# Altium PCB uku20710_proc.PcbDoc (part 2 of 2)
Units mm, origin at the board's own origin, x right, y up, seen from the top; angles counter-clockwise.
Board outline 354.7 x 156.7 mm, 4 copper layers (Top Layer, MidLayer1, MidLayer2, Bottom Layer); 206 components, 528 nets, 730 pads, 458 vias.
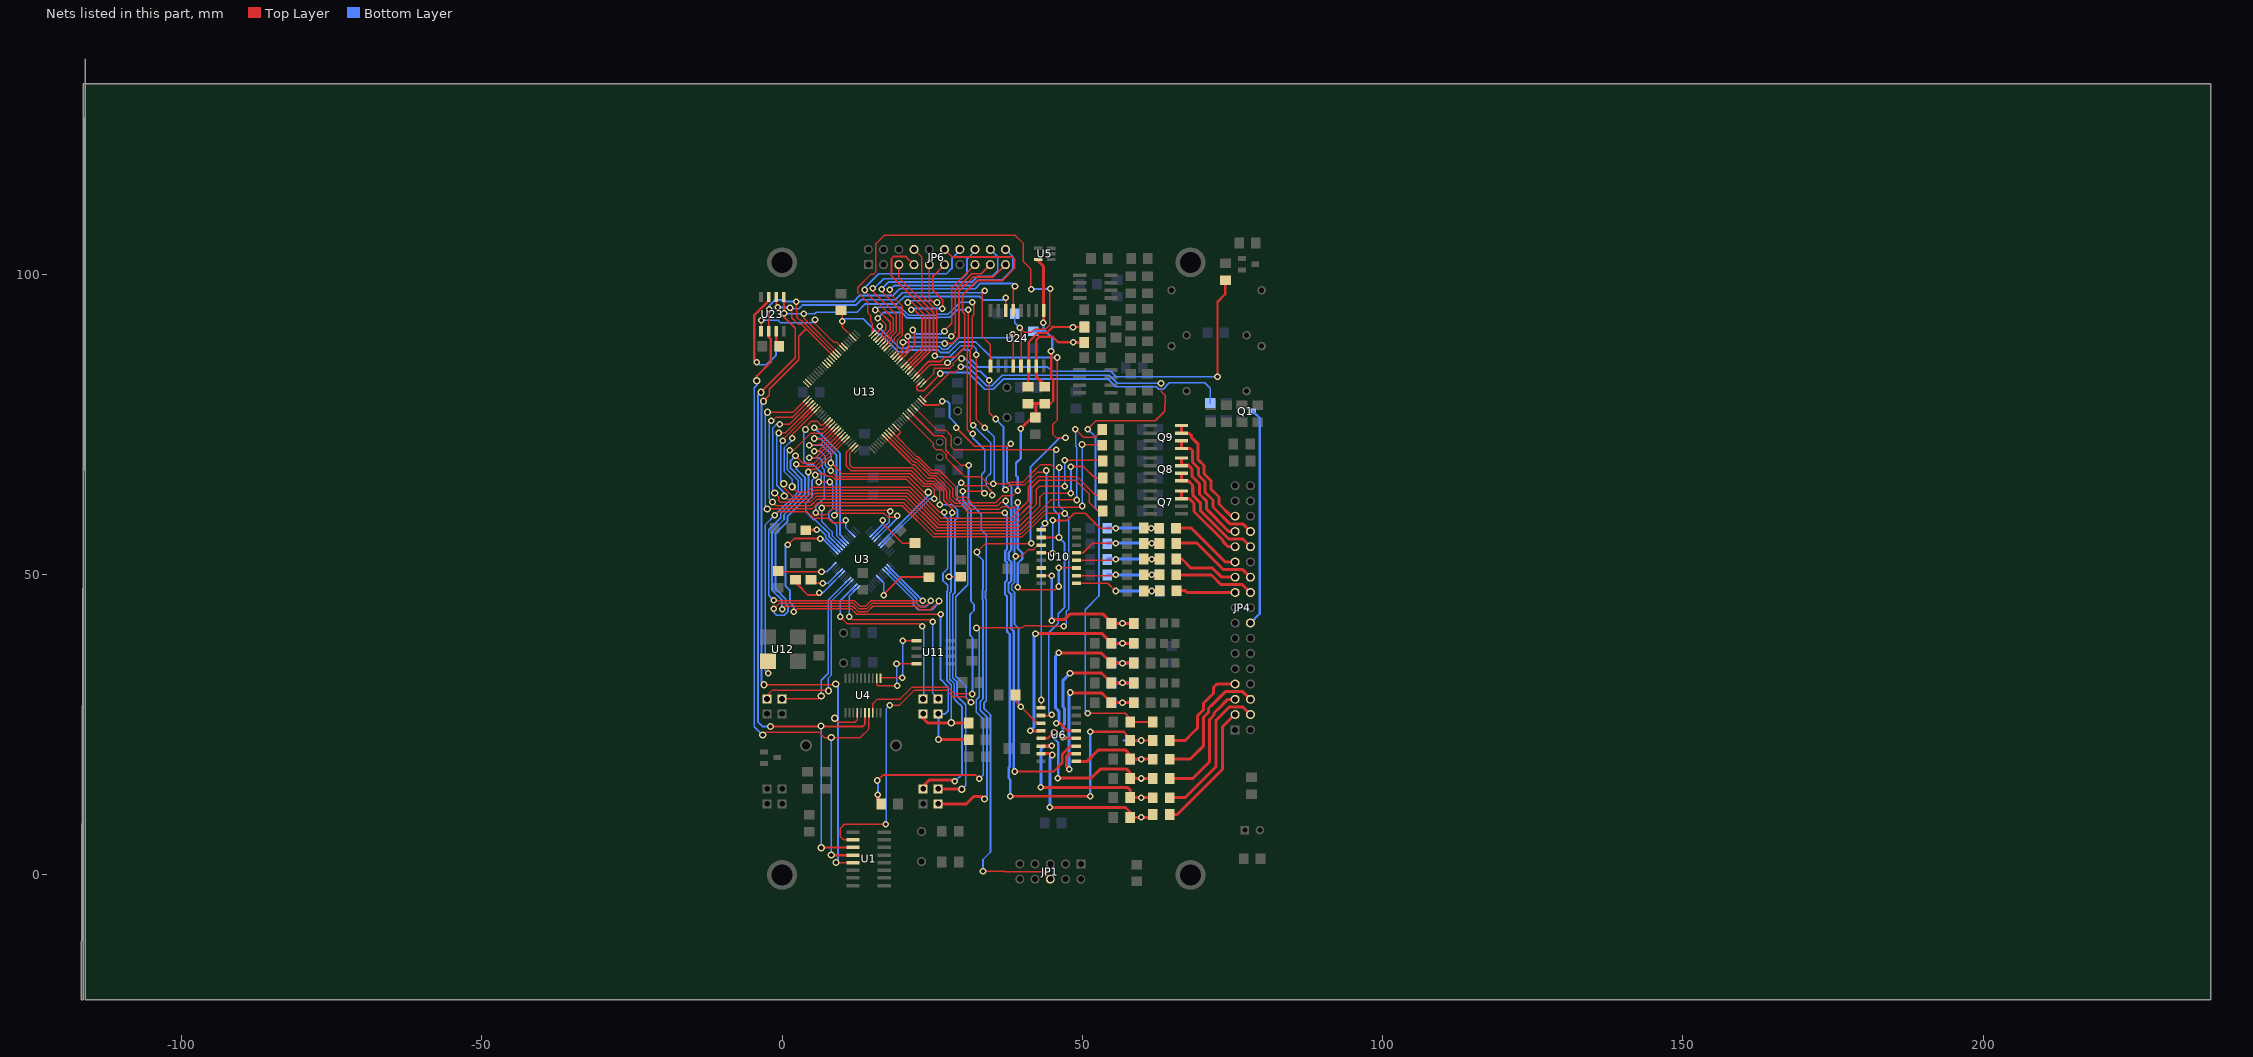
[diagram p2: the nets of this part, all layers, seen from the top]

## Via types
v1: diameter 1.1, hole 0.6, Top Layer to Bottom Layer, 420 vias
v2: diameter 1.2, hole 0.7, Top Layer to Bottom Layer, 29 vias
v3: diameter 1.5, hole 1, Top Layer to Bottom Layer, 8 vias
v4: diameter 1.2, hole 0.6, Top Layer to Bottom Layer, 1 vias

## Nets (pads, with @x,y where several pads share a name; then routed paths per layer and width w, separated by ;. In a path a pad name is that pad's centre, name@x,y a point inside that pad or via, vN(x,y) a via of type N, cw(c..) or ccw(c..) an arc to the next point about the centre after c; other vN are vias at no path point) (continued)
NetQ700_1: 
NetQ700_3: 
NetR3_1: 
NetR3_2: 
NetR3_2: 
NetR3_2: 
NetR3_2: 
NetR3_2: 
NetR3_2: 
NetR3_2: 
NetR4_1: 
NetR4_2: 
NetR5_1: 
NetR5_2: 
NetR6_1: 
NetR6_2: 
NetR7_1: 
NetR7_2: 
NetR7_2: 
NetR8_1: 
NetR8_1: 
NetR8_2: 
NetR8_2: 
NetR20_1: R20.1 U3.7 | length 12.1
  Top Layer w0.3: v1(16.904,46.547) 16.904,46.712 17.853,47.66 18.228,48.035 19.765,49.573 R20.1@24.484,49.573
  Bottom Layer w0.3: U3.7@16.165,49.394 16.913,48.645 16.913,46.706 16.904,46.697 v1(16.904,46.547)
NetR22_2: 
NetR22_2: 
NetR22_2: 
NetR22_2: 
NetR22_2: 
NetR22_2: 
NetR22_2: 
NetR22_2: 
NetR22_2: 
NetR25_1: 
NetR30_2: 
NetR38_1: 
NetR43_1: 
NetR43_2: 
NetR43_2: 
NetR44_2: 
NetR44_2: 
NetR45_2: 
NetR52_1: 
NetR53_1: 
NetR57_1: 
NetR60_1: 
NetR69_2: 
NetR83_1: 
NetR90_2: 
NetR91_1: 
NetR93_1: 
NetR95_1: R95.1 U23.3 | length 2.4
  Top Layer w0.4: R95.1@-1,88.15 -0.965,88.185 U23.3@-0.965,90.5
NetR96_2: R96.2 U23.7 | length 17.7
  Top Layer w0.4: v1(-4.25,85.35) -4.65,85.75 -4.65,93.15 -2.235,95.565 U23.7@-2.235,96.2
  Bottom Layer w0.3: v1(-4.25,85.35) -3.822,84.922 -2.628,84.922 -1,86.55 -1,88.007 R96.2@-1,88.1
NetR112_1: R112.1 U3.26 X8.1 | length 74.1
  Top Layer w0.25: v1(1.951,43.798) 2.416,44.262 11.577,44.262 12.439,43.4 v1(26.4,43.4)
  Top Layer w0.3: v1(0.951,54.95) 1.986,55.985 v1(6.328,55.985)
  Top Layer w0.5: v2@25.987,22.5 R112.1@31.07,22.5 ; v2@26.031,22.5 v2(26.031,22.507)
  Bottom Layer w0.3: v1@0.551,54.95 0.551,48.099 1.301,47.348 1.301,45.398 1.951,44.748 v1(1.951,43.798) ; v1(6.328,55.985) 6.744,55.985 U3.26@8.846,53.884 ; X8.1@25.981,26.858 26.031,26.858 v2(26.031,22.507) ; X8.1@25.997,26.8 27.173,26.8 27.681,27.308 27.681,31.259 26.4,32.54 v1(26.4,43.4) v1@26.5,43.3
NetR113_1: R113.1 U3.28 X7.1 | length 84
  Top Layer w0.25: v1@5.675,66.368 6.076,66.768 7.026,66.768 7.426,66.368 8.326,66.368 8.844,65.85 20.75,65.85 26.25,60.35 v1(27,60.35)
  Top Layer w0.5: X7.1@23.497,26.8 23.497,26.04 24.23,25.307 R113.1@31.032,25.307
  Bottom Layer w0.3: v1@5.675,66.368 4.975,65.668 4.975,62.917 3.925,61.867 3.925,60.516 5.306,59.135 5.478,59.135 7.828,56.785 7.828,56.316 8.135,56.009 U3.28@9.553,54.591 ; v1(27,60.35) 27,59.8 27.6,59.2 27.6,51 26.8,50.2 26.8,49 27.6,48.2 27.6,47.284 27.447,47.131 27.447,39.283 27.447,32.393 27.6,32.24 28.181,31.659 v2(28.181,25.307)
  other v1: 5.525,66.568
NetR114_1: R114.1 U3.27 | length 6
  Top Layer w0.5: R114.1@4.828,57.485 4.878,57.435 5.728,57.435 v1(5.778,57.485)
  Bottom Layer w0.3: v1(5.778,57.485) 6.328,57.485 7.278,56.535 7.278,56.159 U3.27@9.2,54.237
NetR115_1: R115.1 U3.21 | length 5.7
  Top Layer w0.3: R115.1@4.834,49.123 5.409,48.549 v1(6.753,48.549)
  Bottom Layer w0.25: v1(6.753,48.549) 7.648,48.549 U3.21@9.553,50.454
NetR116_1: R116.1 U3.20 | length 12.7
  Top Layer w0.25: R116.1@2.234,49.123 2.234,48.779 3.428,47.585
  Top Layer w0.3: R116.1@2.234,49.123 2.234,48.779 2.234,48.666 4.302,46.598 6.203,46.598 6.403,46.598 v1@6.503,46.698
  Bottom Layer w0.25: v1(6.203,46.998) 6.853,46.998 7.841,47.987 7.841,48.035 U3.20@9.907,50.101
NetR117_2: R117.2 U3.24 | length 9.6
  Top Layer w0.25: R117.2@-0.629,50.448 v1(6.565,50.448) v1@6.578,50.435
  Bottom Layer w0.25: v1(6.565,50.448) 7.425,50.448 U3.24@8.492,51.515
NetR120_1: R120.1 U3.39 | length 10.6
  Top Layer w0.25: v1@16.878,59.185 16.878,58.385 20.015,55.248 R120.1@22.121,55.248
  Bottom Layer w0.3: U3.39@15.104,56.712 16.878,58.486 v1@16.878,59.185
  other v1: 16.778,59.066
NetR305_2: 
NetR306_2: 
NetR504_1: 
NetR505_2: 
NetR505_2: 
NetR510_1: 
NetR600_1: 
NetR600_2: 
NetR603_1: 
NetR603_2: 
NetR605_2: 
NetR702_2: 
NetR704_2: 
NetR705_1: 
NetS2_1: 
NetU1_1: 
NetU1_4: 
NetU1_5: 
NetU3_13: U3.13 X4.1 | length 32.7
  Top Layer w0.25: v1(11.177,42.962) 11.677,42.462 24.78,42.462 v1(25.08,42.162)
  Bottom Layer w0.25: v1(11.177,42.962) 11.177,46.421 U3.13@12.382,47.626 ; v1(25.08,42.162) 25.05,42.131 25.05,30.289 X4.1@26.031,29.308
NetU3_14: U3.14 X3.1 | length 32.6
  Top Layer w0.25: v1(9.676,42.962) 10.792,41.846 22.895,41.846 v1(23.33,41.411)
  Bottom Layer w0.25: v1(9.676,42.962) 9.676,45.628 U3.14@12.028,47.979 ; v1(23.33,41.411) 23.6,41.141 23.6,29.379 X3.1@23.48,29.258
NetU3_16: U3.16 X1.1 | length 30.7
  Top Layer w0.25: X1.1@-2.503,29.3 -2.503,29.833 -1.576,30.759 7.626,30.759 v2(7.726,30.659)
  Bottom Layer w0.25: v2(7.726,30.659) 7.726,32.759 8.226,33.259 8.226,45.592 U3.16@11.321,48.686
NetU3_17: U3.17 X2.1 | length 27.9
  Top Layer w0.25: X2.1@-0.003,29.3 6.067,29.3 v2(6.526,29.759)
  Bottom Layer w0.25: v2(6.526,29.759) 6.526,32.409 7.676,33.56 7.676,45.749 U3.17@10.967,49.04 ; U3.17@10.928,49.035 U3.17@10.963,49.035
NetU4_1: U4.1 U11.1 | length 12.1
  Top Layer w0.25: U4.1@16.402,32.709 16.503,32.809 v1(20.029,32.809) ; v1(20.079,38.961) 20.084,38.965 U11.1@22.38,38.965
  Bottom Layer w0.25: v1(20.029,32.809) 20.079,32.859 v1(20.079,38.961)
NetU4_2: U4.2 U11.4 | length 11.6
  Top Layer w0.25: U4.2@15.752,32.709 15.752,31.66 15.954,31.458 v1(19.155,31.458) ; v1@19.055,35.155 U11.4@22.38,35.155
  Bottom Layer w0.25: v1(19.055,35.159) 19.055,31.558 v1(19.155,31.458)
NetU5_1: 
NetU8_3: 
NetU8_7: 
NetU8_8: 
NetU11_5: 
NetU14_3: 
NetU14_4: 
NetU14_5: 
NetU14_6: 
NetU14_12: 
NetU14_13: 
NetU14_14: 
NetU15_3: 
NetU15_3: 
NetU15_3: 
NetU15_3: 
NetU15_4: 
NetU15_5: 
NetU15_5: 
NetU15_5: 
NetU15_5: 
NetU15_5: 
NetU15_5: 
NetU15_7: 
NetU15_7: 
NetU15_9: 
NetU15_10: 
NetU15_15: 
NetU16_3: 
NetU16_4: 
NetU16_6: 
NetU19_4: 
NetU21_1: 
NetU21_2: 
NetU503_4: 
NetU600_3: 
NetU700_4: 
NetX13_1: 
NetX15_1: 
NetX23_1: 
NetX32_1: 
NetX33_1: 
OFF1: 
OFF2: 
P0_0: U1.2 U13.46 | length 152.8
  Top Layer w0.25: U1.2@11.853,5.801 10.253,5.801 9.702,6.352 9.702,7.752 10.353,8.402 v1(17.254,8.402) ; v1@15.5,93.9 15.45,93.95 15.45,94 15.5,93.95 16.05,93.95 18,92 18,90.75 17.25,90 17.25,89.607 U13.46@16.402,88.759 ; v1(17.955,28.257) 19.555,28.257 22.056,30.758 27.357,30.758 28.507,29.607 30.408,29.607 v1@31.358,28.657 ; v1(29.858,65.316) 30.408,64.766 33.959,64.766 35.009,63.716 v1(35.009,63.216) ; v1(31.65,95.35) 31.95,95.05 31.95,93.25 31.65,92.95 31.65,87.75 31.35,87.45 31.35,75.3 v1(31.8,74.85)
  Bottom Layer w0.25: v1(17.254,8.402) 17.304,8.452 17.304,27.607 v1(17.955,28.257) ; v1(29.858,65.316) 29.207,64.666 29.207,62.466 30.908,60.765 30.908,48.312 28.907,46.312 28.907,33.058 30.708,31.258 30.708,29.507 31.358,28.857 v1@31.358,28.657 ; v1@31.65,95.3 v1(31.65,95.35) ; v1(31.8,74.85) 34.75,71.9 34.75,66.85 33.959,66.059 33.959,64.816 35.009,63.766 v1(35.009,63.216)
  Bottom Layer w0.3: v1(15.5,94.05) 15.95,94.5 19.65,94.5 20.02,94.13 20.099,94.13 21.049,93.18 25.651,93.18 25.801,93.33 27.63,93.33 29.65,95.35 v1(31.65,95.35)
  other v1: 31.458,28.707
P0_1: U4.18 U13.47 | length 112.3
  Top Layer w0.25: U4.18@15.102,27.009 15.104,27.01 15.104,28.457 15.904,29.257 19.655,29.257 21.655,31.258 27.557,31.258 28.707,30.108 v1(31.658,30.108) ; v1(15.9,92.65) 16.05,92.8 16.15,92.8 17.3,91.65 17.3,90.85 16.7,90.25 16.7,89.764 U13.47@16.048,89.112 ; v1(30.108,63.866) 33.408,63.866 v1(33.708,63.566) ; v1(31,94.1) 31,87.9 30.885,87.785 30.885,87.684 30.85,87.648 30.85,74.1 31.5,73.45 v1@31.8,73.45
  Bottom Layer w0.3: v1(15.9,92.65) 16.9,93.65 19.9,93.65 20.85,92.7 25.85,92.7 26,92.85 27.95,92.85 29.2,94.1 v1(31,94.1) ; 28.35,93.25 28.4,93.25 ; v1(30.108,63.866) 30.108,62.266 31.458,60.915 31.458,45.561 31.958,45.061 31.958,44.011 31.308,43.361 31.308,39.86 31.708,39.46 31.708,30.158 v1(31.658,30.108) ; v1(31.75,73.45) 31.75,72.776 33.759,70.768 33.759,67.167 33.258,66.667 33.258,64.016 v1(33.708,63.566)
P0_2: 
P0_2: 
P0_2: 
P0_2: 
P0_2: U13.98 X19.1 | length 78.7
  Top Layer w0.25: U13.98@11.805,71.434 10.677,70.306 10.677,68.068 11.477,67.268 21.529,67.268 23.68,65.117 25.072,65.117 26.281,63.909 v1(26.281,61.617)
  Top Layer w0.5: X19.1@25.981,14.305 29.882,14.305 v2(29.932,14.255)
  Bottom Layer w0.3: v1(26.281,61.617) 28.356,61.617 29.231,60.741 29.231,59.466 28.781,59.016 28.781,47.012 28.687,46.918 28.407,46.638 28.407,32.808 29.007,32.208 ; 28.998,32.199 29.141,32.057 29.141,29.749 30.582,28.308 30.582,14.905 v2(29.932,14.255)
P0_3: 
P0_3: 
P0_3: 
P0_3: 
P0_3: 
P0_3: 
P0_3: R92.1 U13.99 X17.1 | length 79.7
  Top Layer w0.25: U13.99@12.159,71.081 11.227,70.149 11.227,68.268 11.727,67.768 21.779,67.768 23.981,65.567 25.231,65.567 26.931,63.867 26.931,62.367 28.331,60.966 v1(28.331,60.266) ; v1(27.8,49.65) 27.812,49.638 R92.1@29.738,49.637 R92.1@30.057,49.638
  Top Layer w0.5: X17.1@23.48,14.305 23.497,14.322 23.497,14.772 24.53,15.805 28.506,15.805 v1(28.757,15.554)
  Bottom Layer w0.3: v1(28.331,60.266) 28.15,60.085 28.15,47.155 27.927,46.932 27.927,32.592 28.661,31.858 28.661,29.279 28.981,28.958 ; v1(28.757,15.554) 29.98,16.777 29.98,27.957 29.03,28.907 ; 28.986,28.964 29.036,28.914
P0_4: R31.1 U13.81 | length 75.7
  Top Layer w0.25: v2(1.674,64.617) 2.575,63.717 4.125,63.717 4.925,64.517 21.329,64.517 26.497,59.35 38.07,59.35 39.751,61.031 40.986,62.267 40.986,64.669 42.635,66.318 49.086,66.318 52.161,63.243 R31.1@53.338,63.243 ; v1(1.674,72.669) 1.674,73.324 U13.81@5.795,77.445
  Bottom Layer w0.25: v2(1.674,64.617) 1.674,65.818 0.324,67.168 0.324,71.069 1.674,72.419 v1(1.674,72.669)
P0_5: R38.1 U13.80 | length 79.5
  Top Layer w0.25: v1(0.124,72.269) 0.124,72.469 0.213,72.558 0.213,72.569 1.55,73.907 U13.80@5.442,77.798 ; v2(0.274,65.117) 0.274,64.517 1.774,63.017 4.225,63.017 5.225,64.017 21.079,64.017 26.346,58.75 38.45,58.75 41.584,61.884 41.584,64.467 42.835,65.718 48.836,65.718 51.187,63.367 51.187,61.967 52.554,60.6 R38.1@53.4,60.6
  Bottom Layer w0.25: v1(0.124,72.269) -0.226,71.919 -0.226,65.618 v2(0.274,65.117)
P0_6: R30.1 U13.79 | length 82.9
  Top Layer w0.25: v1(-0.526,73.57) 0.541,73.57 U13.79@5.088,78.117 ; v2(0.374,63.067) 0.924,62.517 4.425,62.517 5.425,63.517 20.929,63.517 26.176,58.27 38.87,58.27 42.285,61.685 42.285,64.117 42.885,64.717 v1(47.086,64.717) ; v1(47.1,69) 53.281,69 R30.1@53.388,68.893
  Bottom Layer w0.25: v1(-0.526,73.57) -0.876,73.22 -0.876,64.867 0.374,63.617 v2(0.374,63.067) ; v1@47.1,64.717 v1(47.1,69)
  Bottom Layer w0.3: v1(47.086,64.717) v1@47.086,64.753
P0_7: R37.1 U13.78 | length 85.6
  Top Layer w0.25: v2(-1.226,63.567) -0.576,62.917 -0.576,62.367 -0.226,62.017 4.625,62.017 5.625,63.017 20.679,63.017 25.906,57.79 39.29,57.79 42.935,61.435 42.935,62.917 43.535,63.517 v1(48.086,63.517) ; v1(-0.376,75.02) 1.249,75.02 U13.78@4.734,78.505
  Top Layer w0.3: v1(48.086,67.968) 50.187,67.968 52.061,66.093 R37.1@53.388,66.093
  Bottom Layer w0.25: v2(-1.226,63.567) -1.526,63.867 -1.526,74.42 -0.926,75.02 v1(-0.376,75.02)
  Bottom Layer w0.3: v1@48.036,63.517 v1(48.086,63.517) v1(48.086,67.968)
P0_8: 
P0_8: 
P0_8: 
P0_8: 
P0_8: 
P0_8: 
P0_8: 
P0_8: 
P0_8: 
P0_8: 
P0_8: 
P0_8: 
P0_8: R79.1 U13.77 | length 94.6
  Top Layer w0.25: v1(-1.826,75.62) -1.576,75.62 -1.026,76.17 1.692,76.17 U13.77@4.381,78.859 ; v2(-1.576,62.067) -0.976,61.467 4.775,61.467 5.825,62.517 20.479,62.517 25.686,57.31 39.652,57.31 44.759,62.417 v1(49.086,62.417) ; v1(48.85,74.2) 50.181,72.869 52.137,72.869 53.338,74.07 R79.1@53.338,74.143 ; R79.1@53.338,74.15 R79.1@53.35,74.15
  Bottom Layer w0.25: v1(-1.826,75.62) -2.177,75.27 -2.177,62.667 v2(-1.576,62.067) ; v1(48.85,74.2) 48.9,74.15 48.9,71.35 49.1,71.15 v1@49.1,62.417
P0_8_: 
P0_8_: 
P0_8_: 
P0_9: R80.1 U13.76 | length 94.2
  Top Layer w0.25: v2(-2.477,60.916) 4.975,60.916 6.025,61.967 20.229,61.967 25.366,56.83 39.851,56.83 44.188,61.166 49.737,61.166 v1(49.987,61.417) ; v2(-2.427,77.02) 1.835,77.02 U13.76@4.027,79.213 ; v1(49.95,71.65) R80.1@53.231,71.65
  Bottom Layer w0.25: v2(-2.477,60.916) -2.777,61.216 -2.777,76.67 v2(-2.427,77.02) ; v1(49.95,71.65) 50,71.6 v1@50,61.417
P0_9_: 
P0_9_: 
P0_9_: 
P0_9_: 
P0_10: U13.48
P0_11: U13.49 U24.4 | length 32.5
  Top Layer w0.25: U13.49@15.341,89.819 16.278,90.756 v1(16.278,91.324) ; v1(38.434,90.024) 38.5,90.024 38.515,90.008 U24.4@38.515,84.725
  Bottom Layer w0.3: v1(16.278,91.324) 16.278,91.024 19.629,87.673 20.679,87.673 20.979,87.973 26.231,87.973 26.681,87.523 27.531,87.523 29.431,89.424 37.834,89.424 v1(38.434,90.024)
P0_13: 
P0_15: U1.5 U4.14 U13.62 U23.6 U24.1 | length 175.9
  Top Layer w0.25: U23.6@-0.965,96.2 -0.965,94.99 -0.576,94.601 v1@-0.576,94.25 ; v1(1.324,94.45) 1.6,94.174 1.6,92.77 2.72,91.65 3.257,91.65 U13.62@8.624,86.284 ; v1(33.732,97.226) 33.35,96.843 33.35,89.623 34.705,88.268 U24.1@34.705,84.725
  Top Layer w0.3: v2(-3.077,78.871) -2.127,79.821 -2.127,80.871 2.775,85.773 2.775,89.677 4.002,90.905 ; v2(-3.027,31.659) 8.826,31.659 v2(8.926,31.759) ; v2(8.776,26.058) 9.426,25.407 12.127,25.407 12.502,25.783 U4.14@12.502,27.009 ; v2(8.976,2.052) 9.011,2.017 U1.5@11.828,2.017
  Bottom Layer w0.3: v2(-3.077,78.871) -3.427,78.521 -3.427,32.059 v2(-3.027,31.659) ; v1@-0.576,94.25 -0.376,94.45 1.6,94.45 1.8,94.25 2.775,94.25 3.4,94.875 12.277,94.875 13.177,95.775 18.829,95.775 19.979,96.925 33.432,96.925 v1(33.732,97.226) ; v2(8.776,26.058) 8.826,26.008 v2@9.326,26.008 ; v2(8.926,31.759) 9.326,31.359 9.326,2.402 v2(8.976,2.052)
  other v1: -0.7,94.524
P0_16: U13.63
P0_17: U1.4 U4.17 U13.61 U23.2 U24.13 | length 177.1
  Top Layer w0.25: v2(-3.227,23.257) -2.727,23.757 6.126,23.757 7.026,22.857 13.027,22.857 14.452,24.282 U4.17@14.452,27.009 ; U23.2@-2.235,90.5 -2.235,94.066 v1(-2.127,94.175) ; v1(2.375,95.45) 2.4,92.924 3,92.324 3.29,92.324 U13.61@8.977,86.637 ; U24.13@38.515,93.975 38.515,97.757 v1(38.784,98.026)
  Top Layer w0.4: v2(-4.227,82.272) -4.227,83.022 -1.876,85.373 -1.876,89.224 -2.235,89.582 U23.2@-2.235,90.5 ; v2(8.176,3.302) 8.191,3.287 U1.4@11.828,3.287
  Bottom Layer w0.3: -4.627,36.16 -4.627,81.122 -4.227,81.522 v2(-4.227,82.272) ; -4.627,36.31 -4.627,24.657 v2(-3.227,23.257) ; v1(-2.127,94.175) -2.127,94.748 -1.15,95.724 -0.15,95.724 0.124,95.45 11.927,95.45 12.953,96.475 18.479,96.475 19.579,97.576 32.132,97.576 33.032,98.476 38.334,98.476 v1(38.784,98.026) ; v1@2.351,95.424 2.351,95.426 v1(2.375,95.45) ; v2(8.176,3.302) v2(8.176,22.857)
P0_18: U1.3 U4.16 U13.60 U23.5 U24.14 | length 169.6
  Top Layer w0.25: v1(3.575,93.425) 3.575,92.746 U13.60@9.331,86.991
  Top Layer w0.3: v2(-3.527,80.371) 2.175,86.073 2.175,91.024 0.305,92.893 U23.5@0.305,96.2 ; v2(-1.927,24.707) 13.427,24.707 13.802,25.082 U4.16@13.802,27.009 ; v1@0.3,93.525 v1@0.305,93.53 ; v2(6.526,4.502) 6.58,4.557 U1.3@11.828,4.557 ; U24.14@37.233,93.975 v1(37.233,96.075) v1@37.233,96.275
  Bottom Layer w0.3: -4.027,79.871 v2(-3.527,80.371) ; -4.027,79.871 -4.027,25.457 -3.277,24.707 v2(-1.927,24.707) ; v1@0.3,93.525 0.4,93.425 v1(3.575,93.425) 5.425,93.425 5.675,93.675 12.477,93.675 13.877,95.075 19.129,95.075 20.329,96.275 32.932,96.275 33.482,95.725 36.883,95.725 v1(37.233,96.075) ; v2(6.476,24.757) 6.526,24.707 v2(6.526,4.502)
  other v1: 0.325,93.5
P0_19: U13.59
P0_19: 
P0_20: U13.58 U23.1 | length 18.1
  Top Layer w0.25: U23.1@-3.505,90.5 -3.505,92.296 v1(-3.477,92.324) ; v1(5.475,92.424) 5.475,91.801 8.626,88.65 9.086,88.65 U13.58@10.038,87.698
  Bottom Layer w0.25: v1(-3.477,92.324) -3.427,92.374 -0.726,92.374 -0.276,91.924 4.975,91.924 v1(5.475,92.424)
P0_21: U13.57
P0_23: U6.3 U13.9 | length 85
  Top Layer w0.25: U13.9@17.816,73.556 22.206,69.166 22.49,69.166 24.758,66.898 25.902,66.898 28.4,64.4 28.4,63 29.05,62.35 30.45,62.35 31.35,61.45 35.85,61.45 36.4,62 v1@37.45,62
  Top Layer w0.4: v1(38.75,17.2) 45.235,17.2 46.636,18.6 46.636,20.056 48.017,21.438 U6.3@48.98,21.438
  Bottom Layer w0.4: v1@37.2,62.25 v1(37.25,62.25) 37.25,61.7 38.15,60.8 38.15,54.081 37.733,53.665 37.733,52.514 38.15,52.098 38.15,48.929 37.704,48.483 37.704,47.143 38.15,46.696 38.15,40.95 38.6,40.5 38.6,17.35 v1(38.75,17.2)
P0_24: U10.3 U13.8 | length 55.7
  Top Layer w0.25: U13.8@17.462,73.202 21.388,69.277 ; 21.379,69.269 21.912,68.736 22.312,68.736 24.58,66.468 25.582,66.468 27.9,64.15 27.9,62.8 28.85,61.85 30.2,61.85 31.15,60.9 36.2,60.9 36.6,61.3 37.45,61.3 37.6,61.15 38.65,61.15 v1@39.15,61.65 ; v1(46.086,51.114) 46.104,51.095 U10.3@49.025,51.095
  Top Layer w0.3: v1(39.234,47.863) 39.634,47.463 45.5,47.463 v1(46.05,48.013)
  Bottom Layer w0.4: v1@39.15,61.65 39.25,61.55 39.25,54.349 39.984,53.615 39.984,52.614 39.25,51.88 v1@39.25,47.863 ; v1(46.05,48.013) 46.05,51.078 v1(46.086,51.114)
  other v1: 39.25,62
P0_25: 
P0_25: 
P0_25: 
P0_25: 
P0_25: 
P0_25: 
P0_25: 
P0_25: 
P0_25: 
P0_25: 
P0_25: C28.1 R40.1 R41.1 U13.7 | length 112.3
  Top Layer w0.25: U13.7@17.109,72.849 21.184,68.774 21.652,68.306 21.994,68.306 24.304,65.997 25.41,65.997 25.458,65.948 27.361,64.045 27.361,63.989 27.45,63.9 27.45,62.6 28.65,61.4 29.95,61.4 31.05,60.3 v1(37.1,60.3)
  Top Layer w0.4: v1(38,13.05) v1(51.3,13.05) ; v1(51.3,23.8) 56.895,23.8 58.151,22.545 58.339,22.357 v1(59.839,22.357) 61.724,22.357 R41.1@61.738,22.343
  Bottom Layer w0.3: 56.847,22.353 C28.1@57.947,22.353
  Bottom Layer w0.4: v1@37.1,60.25 37.45,59.9 37.45,54.201 37.153,53.905 37.153,52.274 37.45,51.978 37.45,49.049 37.124,48.723 37.124,46.723 37.45,46.396 37.45,40.5 37.9,40.05 37.9,17.95 37.75,17.8 37.75,16.1 38,15.85 v1(38,13.05) ; v1(51.3,13.05) v1(51.3,23.8) ; C28.1@57.947,22.353 59.836,22.353 v1(59.839,22.357)
P0_27: 
P0_27: 
P0_27: 
P0_27: 
P0_27: 
P0_27: 
P0_27: 
P0_27: 
P0_27: 
P0_27: 
P0_27: 
P0_27: 
P0_27: D11.2 R71.1 U13.25 | length 125.1
  Top Layer w0.25: U13.25@23.473,79.213 23.521,79.213 27.981,83.672 27.981,83.721 28.88,83.721 v1(29.78,84.621) ; v1(50.887,74.22) 52.287,75.62 56.338,75.62 ; v1(50.9,26.9) 57.146,26.9 57.939,26.108 57.939,25.557 57.996,25.5 58.053,25.443 R71.1@61.738,25.443 61.74,25.445 R71.1@61.74,25.457 ; 56.338,75.6 62.15,75.6 63.739,77.189 63.739,78.42 ; D11.2@57.5,25.35 D11.2@57.955,25.35 ; v1(63.1,81.85) 63.1,80.511 63.84,79.771 63.84,78.521 63.739,78.42 ; 63.739,78.47 63.739,78.42
  Bottom Layer w0.3: v1(29.78,84.621) 30.929,84.621 34.1,81.45 34.933,81.45 ; 34.95,81.45 34.933,81.45 ; v1(50.887,74.22) 52.2,72.907 52.2,61 52.75,60.45 52.75,46.426 50.487,44.162 50.487,27.313 v1(50.9,26.9) ; v1(63.1,81.85) 55.81,81.85 54.488,83.172 36.655,83.172 34.933,81.45
P0_28: R10.1 U6.11 U10.11 U13.24 | length 77.5
  Top Layer w0.25: v1(38.9,53.064) 39.934,53.064 41.034,54.165 41.885,54.165 42.635,54.915 U10.11@43.135,54.915 ; R10.1@38.96,30.008 38.934,28.808 v1(39.734,28.008) 42.494,25.248 U6.11@43.13,25.248
  Top Layer w0.3: U13.24@23.119,78.859 23.728,78.25 26.1,78.25 v1(26.7,78.85) ; v1(29,74.45) 32.1,71.35 ; 32.082,71.369 37.682,71.369 ; 37.7,71.35 v1(38.1,71.75)
  Bottom Layer w0.3: v1(26.7,78.85) 27.5,78.85 27.9,78.45 27.9,76.15 29,75.05 v1(29,74.45) ; v1(38.1,71.75) 37.45,71.1 37.45,65.45 38.2,64.7 38.2,61.5 38.7,61 38.7,48.73 38.234,48.263 38.234,47.513 38.7,47.047 38.7,41.75 39.35,41.1 v1@39.35,28.008
P0_29: R72.1 U13.29 | length 71.2
  Top Layer w0.25: U13.29@22.412,82.748 24.614,84.95 27.25,84.95 v1(27.55,85.25)
  Top Layer w0.4: v1(72.5,82.95) 72.5,95.4 73.793,96.693 73.793,99.026 R72.1@73.793,99.05
  Bottom Layer w0.3: v1(27.55,85.25) 27.808,85.25 29.98,87.422 31.031,87.422 31.331,87.122 31.331,85.919 32.167,85.083 32.7,84.55 44.25,84.55 44.95,83.85 54.75,83.85 55.65,82.95 v1(72.5,82.95)
P0_30: JP6.12 U13.30 | length 43.6
  Top Layer w0.3: U13.30@22.059,83.102 24.457,85.5 26.408,85.5 27.08,86.172 28.73,86.172 30.43,87.872 30.43,93.374 30.05,93.754 30.05,96.6 32.4,98.95 36.65,98.95 38.7,101 38.7,102.55 38.35,102.9 28.29,102.9 JP6.12@27.05,104.14
P1_0: U3.3 U13.95 | length 76.5
  Top Layer w0.25: v1(-1.399,44.298) -0.512,45.185 11.908,45.185 12.826,44.268 14.033,44.268 14.95,45.185 22.478,45.185 23.028,44.635 23.778,44.635 v1(24.778,45.635) ; v1@4.375,67.068 4.857,67.55 5.8,67.55 U13.95@10.745,72.495
  Bottom Layer w0.3: -1.399,43.735 -0.876,43.212 0.374,43.212 0.974,43.812 0.974,44.762 0.624,45.112 0.624,45.913 -1.076,47.613 -1.076,56.865 0.924,58.866 0.924,59.716 4.375,63.167 4.375,67.018 v1(4.325,67.068) ; U3.3@17.579,50.808 22.428,45.959 22.428,45.185 22.928,44.685 23.978,44.685 24.778,45.485 v1(24.778,45.635)
P1_1: U3.4 U13.94 | length 78.8
  Top Layer w0.25: v1(0.001,44.248) 0.489,44.735 11.75,44.735 12.648,43.838 14.211,43.838 15.108,44.735 22.278,44.735 22.878,44.135 24.678,44.135 v1(26.128,45.585) ; v1(2.375,68.368) 2.693,68.05 5.628,68.05 U13.94@10.391,72.813
  Bottom Layer w0.3: v1@0.201,44.448 v1(0.001,44.248) 0.001,45.736 -1.676,47.413 -1.676,57.165 0.324,59.166 0.324,59.966 3.825,63.467 3.825,66.118 2.375,67.568 v1(2.375,68.368) ; U3.4@17.225,50.454 21.878,45.802 21.878,44.935 22.678,44.135 24.978,44.135 26.128,45.285 v1(26.128,45.585)
P1_4: U3.2 U13.93 | length 71.4
  Top Layer w0.25: v1@-1.399,45.648 11.554,45.641 ; v1(2.225,69.769) 3.443,68.55 5.386,68.55 U13.93@10.038,73.202 ; 11.554,45.648 12.054,45.648 13.004,44.698 13.854,44.698 14.805,45.648 15.205,45.648 ; 15.205,45.64 v1(23.428,45.635)
  Bottom Layer w0.3: v1(-1.399,45.748) -2.227,46.575 -2.227,57.466 -0.226,59.466 -0.226,60.166 3.225,63.617 3.225,65.868 1.424,67.668 1.424,68.968 v1(2.225,69.769) ; U3.2@17.932,51.161 23.428,45.666 v1(23.428,45.635)
P1_8: U3.40 U13.92 | length 36.8
  Top Layer w0.25: v1(4.55,69.45) 5.578,69.45 U13.92@9.684,73.556 ; v1(5.625,60.266) 5.975,59.916 7.326,59.916 8.326,60.916 9.245,60.916 9.426,60.735 v1@17.828,60.735
  Bottom Layer w0.25: v1(4.55,69.45) 6.194,69.45 6.676,68.968 6.676,67.818 7.026,67.468 7.026,62.767 5.625,61.367 v1(5.625,60.266) ; U3.40@15.457,56.359 17.828,58.73 v1@17.828,60.735
  other v1: 18.029,60.516
P1_9: U3.43 U13.91 | length 39.7
  Top Layer w0.25: v1(5.35,70.5) 5.921,70.5 U13.91@9.331,73.909 ; v1@8.126,67.218 9.044,66.3 21.047,66.3 23.63,63.717 v2(24.33,63.717)
  Bottom Layer w0.25: v1(5.35,70.5) 6.394,70.5 7.226,69.669 7.226,68.118 v1@8.126,67.218 ; U3.43@16.518,55.298 16.598,55.378 24.33,63.11 v2(24.33,63.717)
  other v1: 8.126,67.268
P1_10: U3.44 U13.90 | length 43.4
  Top Layer w0.25: v1(4.55,71.55) 4.65,71.65 6.364,71.65 U13.90@8.977,74.263 ; v1@8.176,68.618 9.994,66.8 21.35,66.8 23.483,64.667 24.83,64.667 25.35,64.148 v1(25.35,62.6)
  Bottom Layer w0.25: U3.44@16.993,55.066 24.527,62.6 v1(25.35,62.6)
  Bottom Layer w0.3: v1(4.55,71.55) 6.645,71.55 8.176,70.019 v1@8.176,68.618 ; U3.44@16.872,54.944 U3.44@16.993,55.066
  other v1: 8.126,68.568
P1_14: U3.41 U13.89 | length 35.1
  Top Layer w0.25: v1(5.35,72.65) 6.657,72.65 U13.89@8.624,74.616 ; v1(8.726,59.866) 9.026,60.166 17.028,60.166 17.628,59.566 18.829,59.566 v1@19.079,59.816
  Bottom Layer w0.25: U3.41@15.811,56.005 19.079,59.273 v1@19.079,59.816
  Bottom Layer w0.3: v1(5.35,72.65) 6.345,72.65 9.05,69.945 9.05,60.19 v1(8.726,59.866)
  other v1: 19.179,59.816
P1_15: U3.34 U12.3 U13.88 | length 67.1
  Top Layer w0.25: U12.3@-2.35,35.559 -2.327,35.536 v1(-2.327,33.56) ; v1(-1.226,59.866) -0.676,60.416 4.225,60.416 5.255,59.386 7.656,59.386 8.426,58.616 10.177,58.616 v1(10.627,59.066) ; v1(1.274,70.719) 1.969,70.719 4.8,73.55 6.85,73.55 U13.88@8.27,74.97
  Bottom Layer w0.25: v1(-2.327,33.56) -2.827,34.06 -2.827,58.266 v1(-1.226,59.866) 2.675,63.767 2.675,65.668 0.874,67.468 0.874,70.319 v1(1.274,70.719) ; v1(10.627,59.066) 10.627,57.76 U3.34@11.674,56.712
P1_16: U3.31 U13.87 | length 24.2
  Top Layer w0.25: v1(5.35,74.45) 5.6,74.2 6.793,74.2 U13.87@7.916,75.323
  Bottom Layer w0.3: v1(5.35,74.45) 9.65,70.15 9.65,56.592 U3.31@10.677,55.565
P1_17: U3.30 U13.86 | length 29
  Top Layer w0.25: v1(3.9,74.15) 3.9,74.5 4.95,75.55 5.8,75.55 6.5,74.85 6.736,74.85 U13.86@7.563,75.677 ; v1(6.126,65.418) v1(7.926,65.418)
  Bottom Layer w0.25: v1@8.126,65.217 8.426,64.917 8.426,61.016 7.776,60.366 7.776,59.516 9.076,58.216 9.076,56.482 U3.30@10.26,55.298
  Bottom Layer w0.3: v1(3.9,74.15) 3.6,73.85 3.6,68.943 4.275,68.268 5.225,68.268 6.526,66.968 6.526,65.818 v1(6.126,65.418)
P1_18: JP6.5 U13.32 | length 21.8
  Top Layer w0.3: JP6.5@19.43,101.6 19.43,99.47 25.2,93.7 25.2,87.657 U13.32@21.351,83.809
P1_19: JP6.7 U13.33 | length 27
  Top Layer w0.3: U13.33@20.998,84.162 24.55,87.714 24.55,93.4 18.2,99.75 18.2,102.6 18.55,102.95 20.62,102.95 JP6.7@21.97,101.6
P1_20: JP6.9 U13.34 | length 25.5
  Top Layer w0.3: U13.34@20.644,84.516 23.9,87.772 23.9,93.05 21.65,95.3 v1@21.1,95.3 ; JP6.9@24.51,101.6 24.51,96.04 25.525,95.025 v1@25.55,95
  Bottom Layer w0.3: v1@21.1,95.3 21.4,95.6 24.95,95.6 25.525,95.025 v1@25.55,95
  other v1: 20.9,95.3 25.8,95.3
P1_21: 
P1_21: JP6.11 U13.35 | length 25.7
  Top Layer w0.25: v1@21.5,94.05 22.05,94.05 22.35,93.75
  Top Layer w0.3: U13.35@20.291,84.869 23.3,87.879 23.3,92.8 22.35,93.75 ; v1@26.75,94.15 26.75,94.25 26.75,95.65 25.15,97.25 25.15,99.7 JP6.11@27.05,101.6
  Bottom Layer w0.3: v1@21.5,94.05 21.525,94.075 21.75,94.3 26.6,94.3 26.675,94.225 v1@26.7,94.2
  other v1: 21.5,94.1 26.7,94.25
P1_22: JP6.13 U13.36 | length 27.2
  Top Layer w0.25: v1@21.2,91.9 22.1,91.9 22.65,91.35 22.65,87.936 ; v1(26.7,91.85) 27.2,91.85 27.65,92.3 27.65,93.25
  Top Layer w0.3: U13.36@19.937,85.223 22.65,87.936 ; 27.65,93.25 27.65,95.65 26.15,97.15 26.15,98.5 29.25,101.6 JP6.13@29.59,101.6
  Bottom Layer w0.3: v1@21.2,91.85 v1(26.7,91.85) v1@26.75,91.9
  other v1: 20.928,91.723
P1_22: 
P1_22: 
P1_22: 
P1_22: 
P1_22: 
P1_22: 
P1_22: 
P1_23: JP6.15 U13.37 | length 25.4
  Top Layer w0.25: v1@26.95,90.55 26.975,90.575 28.25,91.85 28.25,91.95
  Top Layer w0.3: U13.37@19.584,85.576 22.05,88.043 22.05,90.55 21.828,90.772 v1@21.7,90.9 ; 28.25,91.95 28.25,97.72 JP6.15@32.13,101.6
  Bottom Layer w0.3: v1@21.7,90.9 v1@21.75,90.85 ; v1@21.75,90.7 21.753,90.697 22.4,90.05 26.45,90.05 v1@26.95,90.55
  other v1: 27.05,90.5 21.778,90.723
P1_24: JP6.17 U13.38 | length 27
  Top Layer w0.25: v1(28.15,89.65) 28.85,90.35 28.85,91.15
  Top Layer w0.3: U13.38@19.23,85.93 21.1,87.8 v1@21.1,89.45 ; 28.85,91.15 28.85,97.35 31.6,100.1 33.17,100.1 JP6.17@34.67,101.6
  Bottom Layer w0.25: 26.15,89.45 27.95,89.45 v1(28.15,89.65)
  Bottom Layer w0.3: v1@21.1,89.45 26.15,89.45
  other v1: 20.928,89.673
P1_25: 
P1_25: 
P1_25: 
P1_25: 
P1_25: 
P1_25: JP6.19 U13.39 | length 29.9
  Top Layer w0.3: U13.39@18.877,86.284 20.15,87.557 v1(20.128,88.672) ; v1(27.08,88.472) 28.3,88.472 29.45,89.623 29.45,97.15 31.85,99.55 35.16,99.55 JP6.19@37.21,101.6
  Bottom Layer w0.3: v1(20.128,88.672) 26.879,88.672 v1(27.08,88.472)
P1_26: JP6.20 U13.40 | length 38
  Top Layer w0.25: v1(17.95,97.45) 17.95,96.8 20.05,94.7 20.05,89.9 19.2,89.05 19.2,87.314 U13.40@18.523,86.637
  Bottom Layer w0.3: v1(17.95,97.45) 18.65,98.15 31.85,98.15 32.75,99.05 36.55,99.05 38.45,100.95 38.45,102.9 JP6.20@37.21,104.14
P1_27: JP6.18 U13.43 | length 36.9
  Top Layer w0.25: v1@16.5,97.2 19.6,94.1 19.6,90.25 18.65,89.3 18.65,88.886 U13.43@17.462,87.698 ; U13.43@17.3,87.55 U13.43@17.455,87.705
  Bottom Layer w0.3: v1@16.5,97.2 16.5,97.476 16.5,97.5 16.527,97.527 17.7,98.7 31.6,98.7 32.55,99.65 34.95,99.65 35.9,100.6 35.9,102.91 JP6.18@34.67,104.14
  other v1: 16.578,97.476
P1_28: JP6.16 U13.44 | length 33.2
  Top Layer w0.25: v1@15.05,97.4 15.05,97.25 19.05,93.25 19.05,90.5 18.98,90.43 18.98,90.422 18.177,89.619 18.177,89.12 U13.44@17.109,88.051
  Bottom Layer w0.3: v1@15.05,97.4 15.226,97.576 16.9,99.25 29.9,99.25 30.8,100.15 30.8,102.55 32.13,103.88 JP6.16@32.13,104.14
  other v1: 15.127,97.675
P1_29: 
P1_29: 
P1_29: 
P1_29: 
P1_29: JP6.14 U13.45 | length 31.9
  Top Layer w0.25: v1@13.476,97.675 13.476,97.525 13.701,97.3 15.677,95.324 15.877,95.324 18.527,92.673 18.527,90.623 17.727,89.823 17.727,89.377 U13.45@16.755,88.405
  Bottom Layer w0.3: v1@13.676,97.675 16.077,100.075 27.38,100.075 28.28,100.975 28.28,102.576 29.59,103.886 JP6.14@29.59,104.14
  other v1: 13.776,97.375
P1_30: U6.10 U10.10 U13.21 | length 78.8
  Top Layer w0.25: U13.21@22.059,77.798 25.807,74.05 27.2,74.05 28.15,73.1 28.15,71.3 28.65,70.8 v1(45.65,70.8) ; U6.10@43.13,26.518 43.148,26.5 44.878,26.5 v1@44.935,26.558
  Top Layer w0.3: U10.10@43.175,56.175 v1@46.126,56.175
  Bottom Layer w0.3: v1@44.935,26.558 44.4,27.093 44.4,40.276 45.986,41.862 45.986,43.498 47.05,44.562 47.05,55.201 v1@46.136,56.115 ; v1(45.65,70.8) 45.25,70.4 45.25,60.802 46.1,59.952 v1@46.1,56.115
  other v1: 44.935,26.658 46.11,56.175
P1_31: R22.1 U13.20 | length 108.1
  Top Layer w0.25: U13.20@21.705,77.445 25.58,73.57 26.931,73.57 27.681,72.819 27.681,71.069 28.732,70.018 31.008,70.018 v1(31.208,69.818)
  Top Layer w0.3: R22.1@7.308,14.342 12.841,14.342 15.754,17.254 35.059,17.254 36.632,15.681 v1(39.11,15.681) ; v1(34.533,28.208) 36.533,26.208 v1(39.684,26.208)
  Bottom Layer w0.3: v1(31.208,69.818) 32.058,68.967 32.058,67.743 31.582,67.267 31.582,62.517 33.833,60.266 33.833,57.816 34.533,57.115 34.533,47.263 34.333,47.063 34.333,46.213 34.533,46.013 v1(34.533,28.208) ; v1(39.11,15.681) 39.734,16.305 39.734,18.006 39.134,18.606 39.134,25.658 v1(39.684,26.208)
P1_31: 
P1_31: 
P1_31: 
P1_31: 
P1_31: 
P1_31: 
P1_31: 
P1_31: 
P1_31: 
P1_31: 
P1_31: 
P1_31: 
P1_31: 
P2_0: U13.75
P2_1: U13.74
P2_7: U13.66
P2_8: U13.65
P2_9: U13.64
P2_10: R9.2 U13.53 X20.1 | length 142.3
  Top Layer w0.25: R9.2@9.875,94.024 10.05,93.849 v1(10.05,92.2) 10,92.15 10,91.271 U13.53@11.806,89.466 ; v1(32.45,53.75) 33.8,55.1 v1@41.45,55.1 ; v1(45.85,86.15) 45.85,75.75 45.05,74.95 45.05,73.4 45.7,72.75 v1(47.2,72.75)
  Top Layer w0.5: X20.1@25.997,11.8 30.678,11.8 31.882,13.004 33.282,13.004 v2(33.682,12.604)
  Bottom Layer w0.3: v1(10.05,92.2) 10.45,92.6 13.499,92.6 16.027,90.073 16.377,90.073 19.378,87.072 20.928,87.072 21.228,87.372 25.979,87.372 26.379,86.972 27.78,86.972 29.53,88.722 32.231,88.722 34.803,86.15 v1(45.85,86.15) ; v1(32.45,53.75) 32.45,53.35 33.45,52.35 33.45,47.538 33.373,47.461 33.373,45.815 33.45,45.738 33.45,29.3 33,28.85 33,27.4 34.1,26.3 34.1,13.022 v2(33.682,12.604) ; v1@41.45,55.1 41.35,55.2 41.35,67.85 46.25,72.75 v1(47.2,72.75)
  other v1: 41.484,55.215
P2_13: R97.1 U13.50 U24.5 | length 74.9
  Top Layer w0.25: U13.50@14.987,90.173 14.987,91.865 14.728,92.124 14.728,93.147 14.3,93.575 14.3,95.275 12.627,96.948 12.627,97.85 14.804,100.026 15.278,100.026 15.628,100.376 15.628,105.078 17.028,106.478 38.834,106.478 40.184,105.128 40.184,102.077 41.434,100.826 v1@41.434,97.576 ; v1(39.584,91.124) v1@39.785,90.923 ; U24.5@39.785,84.725 v1@39.785,90.923 ; v1(44.635,97.576) 44.535,97.476 44.535,91.524 43.835,90.824 42.035,90.824 41.584,90.374 40.334,90.374 v1@39.785,90.923
  Bottom Layer w0.3: R97.1@38.746,93.418 38.746,91.962 v1(39.584,91.124) ; v1(41.484,97.526) v1@44.585,97.526
P3_25: R84.1 U13.27 | length 57.5
  Top Layer w0.25: U13.27@23.119,82.041 22.43,81.351 22.43,80.871 22.68,80.621 23.58,80.621 26.331,83.372 v1(26.331,83.472)
  Bottom Layer w0.3: v1(26.331,83.472) 26.481,83.622 31.032,83.622 33.782,80.871 35.183,80.871 36.883,82.572 54.238,82.572 55.538,81.272 62.34,81.272 62.74,80.871 63.44,80.871 64.49,81.922 70.392,81.922 71.289,81.025 R84.1@71.289,78.568
P3_26: U6.9 U10.9 U13.26 | length 84.3
  Top Layer w0.25: U13.26@23.473,81.687 25.279,83.494 25.279,84.221 25.429,84.371 27.98,84.371 28.48,84.871 28.48,85.121 29.53,86.172 29.88,86.172 v1@30.08,86.172 ; v1(34.5,82.35) 34.5,76.95 v1(35.55,75.9) ; v1@37.066,64.15 v1(37.2,64.15) 37.966,64.916 40.36,64.916 42.511,67.067 v1@44.011,67.067 ; U6.9@43.13,27.788 43.13,28.78 v1@43.15,28.8 ; U10.9@43.175,57.445 43.785,58.055 v1(43.785,58.516)
  Bottom Layer w0.3: v1@30.08,86.172 30.228,86.172 32.55,83.85 33,83.85 v1(34.5,82.35) ; v1(35.55,75.9) 36.85,74.6 36.85,64.35 37.125,64.075 v1@37.25,63.95 ; 43.135,56.615 43.135,57.866 44.011,58.742 v1@44.011,67.067 ; v1@43.15,28.8 43.15,29.108 43.15,57.2
  other v1: 43.185,29.108 44.011,67.317 29.88,85.972
PB1: 
PB1: 
PB2: 
PB2: 
PB3: 
PB3: 
PE6: 
PE6: 
PE7: 
PQ3: 
PQ4: 
PQ5: 
PQ6: 
PROG0: 
PROG1: 
PROG1: 
PROG1: 
PWM1: 
PWM2: 
REL1: JP4.24 Q7.5 Q7.6 | length 17.1
  Top Layer w0.5: Q7.6@66.512,61.37 Q7.5@66.512,60.1 66.512,60.088 Q7.5@67.412,60.088 ; Q7.5@67,60.2 67,60.15 67.8,60.15 72.55,55.4 72.55,54.55 73.75,53.35 76.73,53.35 JP4.24@77.99,52.09
REL1: 
REL2: JP4.25 Q7.7 Q7.8 | length 14.4
  Top Layer w0.5: Q7.8@66.512,63.91 Q7.7@66.512,62.64 66.524,62.65 67.8,62.65 68.6,61.85 68.6,60.5 73.45,55.65 73.45,55.45 74.27,54.63 JP4.25@75.45,54.63
REL3: JP4.26 Q8.5 Q8.6 | length 20.1
  Top Layer w0.5: Q8.6@66.5,66.865 Q8.5@66.5,65.595 66.503,65.597 66.55,65.55 67.7,65.55 68.35,64.9 68.35,63.6 ; 68.4,64.7 68.4,63.2 69.65,61.95 69.65,60.65 74.4,55.9 76.72,55.9 JP4.26@77.99,54.63
REL4: JP4.27 Q8.7 Q8.8 | length 17.3
  Top Layer w0.5: Q8.8@66.5,69.405 Q8.7@66.5,68.135 66.565,68.2 67.65,68.2 68.25,67.6 68.25,66.35 69.5,65.1 69.5,63.4 70.7,62.2 70.7,60.85 74.38,57.17 JP4.27@75.45,57.17
REL5: JP4.28 Q9.5 Q9.6 | length 22
  Top Layer w0.5: Q9.5@66.5,70.995 Q9.5@66.5,71 ; Q9.6@66.5,72.265 Q9.5@66.5,71 ; JP4.28@77.99,57.17 76.71,58.45 74.55,58.45 71.75,61.25 71.75,62.4 70.4,63.75 70.4,65.5 69.35,66.55 69.35,67.7 68.35,68.7 68.35,70.65 68,71 Q9.5@66.5,71
REL6: JP4.29 Q9.7 Q9.8 | length 20
  Top Layer w0.5: Q9.8@66.5,74.805 Q9.7@66.5,73.535 66.493,73.542 66.45,73.5 66.5,73.5 67.8,73.5 68.2,73.1 68.2,72.8 69.3,71.7 69.3,69.1 70.25,68.15 70.25,66.8 71.4,65.65 71.4,64.25 72.75,62.9 72.75,61.75 74.79,59.71 JP4.29@75.45,59.71
REL7: JP4.16 Q1.3 | length 36.3
  Bottom Layer w0.4: JP4.16@77.99,41.93 79.544,43.484 79.544,76.07 Q1.3@78.444,77.171
RES: D1.1 JP6.8 U3.29 U13.17 | length 225.8
  Top Layer w0.25: v1(6.628,61.085) 7.028,61.485 ; v1@6.99,61.447 19.998,61.447 25.13,56.315 40.015,56.315 43.866,60.166 v1@47.136,60.166 ; U13.17@20.644,76.384 25.2,71.828 25.2,71.25 25.7,70.75 26.55,70.75 27.3,70 27.3,69.4 29.512,67.188 30.382,66.318 33.115,66.318 34.315,65.117 v1(35.133,65.117) ; JP6.8@21.97,104.14 23.25,102.86 23.25,96.45 25.75,93.95 v1@25.75,86.55 ; v1(32.3,86.6) 32.3,75.9 v1(33.75,74.45) ; v2(32.382,41.1) v2@32.482,41.1 ; v2@32.494,41.111 33.582,41.111 ; 33.582,41.1 39.95,41.1 40.35,41.5 43,41.5 43.15,41.35 v1@46.936,41.35 ; v1@34.95,65.1 37.542,65.1 37.788,65.346 40.032,65.346 41.907,67.221 ; 41.911,67.217 43.01,68.316 44.762,68.316 45.26,67.818 v1(46.186,67.818)
  Top Layer w0.3: v1(15.854,15.704) 16.754,16.604 32.258,16.604 v1(32.858,16.004)
  Top Layer w0.5: v1(15.954,13.353) 15.954,12.367 D1.1@16.509,11.812
  Bottom Layer w0.25: v1(6.628,61.085) 6.628,58.785 8.328,57.085 8.328,56.523 U3.29@9.907,54.944 ; v1(25.429,86.422) 25.579,86.272 27.93,86.272 29.78,88.122 31.781,88.122 32.3,87.603 v1(32.3,86.6) v1@32.25,86.55 ; v2(32.382,41.1) 32.832,40.65 32.832,29.659 32.332,29.158 32.332,27.108 33.482,25.958 33.482,17.104 33.482,16.628 v1(32.858,16.004) ; v1(33.75,74.45) 35.35,72.85 35.35,65.25 v1@35.2,65.1 ; 46.1,61.467 46.1,67.733 v1(46.186,67.818) ; 46.136,61.467 47.1,60.502 v1(47.1,60.166) 47.7,59.566 47.7,44.226 47.286,43.812 47.286,41.712 v1(46.936,41.361)
  Bottom Layer w0.3: v1(15.854,15.704) 15.954,15.604 v1(15.954,13.353)
RX: 
RXCAN: 
SK1: JP4.23 R43.1 | length 12.2
  Top Layer w0.5: R43.1@65.609,57.716 R43.1@65.603,57.722 68.185,57.722 73.817,52.09 JP4.23@75.45,52.09
SK2: JP4.22 R45.1 | length 14.7
  Top Layer w0.5: R45.1@65.641,55.215 69.091,55.215 73.492,50.814 76.726,50.814 JP4.22@77.99,49.55
SK3: JP4.21 R49.1 | length 11
  Top Layer w0.5: R49.1@65.653,52.571 66.584,52.571 68.091,51.064 71.692,51.064 73.206,49.55 JP4.21@75.45,49.55
SK4: JP4.20 R51.1 | length 13.6
  Top Layer w0.5: R51.1@65.641,49.914 71.492,49.914 73.092,48.313 76.687,48.313 JP4.20@77.99,47.01
T3: 
T3: 
TD1: 
TX: 
U2: U10.14
U5: 
U6: 
U7: 
U8: 
UAKB: 
UB1: JP4.3 R25.2 | length 21.9
  Top Layer w0.5: R25.2@64.538,10.046 65.796,10.046 73.3,17.55 73.3,24.6 75.39,26.69 JP4.3@75.45,26.69
UB2: JP4.5 R29.2 | length 20.7
  Top Layer w0.5: R29.2@64.538,16.043 68.393,16.043 71.2,18.85 71.2,25.866 71.942,26.608 71.942,26.958 72.492,27.508 ; 72.5,27.5 74.23,29.23 JP4.5@75.45,29.23
UBM1: JP4.4 R27.2 | length 24.8
  Top Layer w0.5: R27.2@64.538,12.843 67.093,12.843 72.25,18 72.25,25.75 74.45,27.95 76.73,27.95 JP4.4@77.99,26.69
UBM2: JP4.6 R33.2 | length 21.8
  Top Layer w0.5: R33.2@64.538,19.243 67.943,19.243 70.2,21.5 70.2,26.266 70.992,27.058 70.992,27.708 71.442,28.158 ; 71.45,28.15 73.8,30.5 76.72,30.5 JP4.6@77.99,29.23
UIB1: C65.2 R122.2 R126.1 U24.7 | length 19
  Top Layer w0.4: U24.7@42.325,84.571 U24.7@42.325,84.725 42.325,89.064 42.833,89.573 45.084,89.573 46,88.657 v1(48.486,88.657) R122.2@50.312,88.657
  Top Layer w0.5: U24.7@42.325,84.725 42.325,82.925 43.743,81.507 R126.1@43.743,81.262
  Bottom Layer w0.4: v1(48.486,88.657) 48.503,88.673 50.347,88.673 C65.2@50.387,88.673
UIB2: C16.2 R62.2 R66.1 U24.6 | length 21
  Top Layer w0.4: R66.1@40.943,81.262 40.943,82.693 41.055,82.805 U24.6@41.055,84.725 41.055,88.694 42.583,90.223 44.034,90.223 44.584,90.773 ; 44.603,90.753 45.1,91.25 48.436,91.224 50.362,91.203 50.947,91.203 R62.2@51,91.15
  Bottom Layer w0.4: v1@48.437,91.224 C16.2@50.297,91.203 C16.2@50.897,91.203
  other v1: 48.436,91.174
ULOAD: JP4.19 R36.2 | length 9.9
  Top Layer w0.5: R36.2@65.678,47.306 67.147,47.306 67.444,47.01 JP4.19@75.45,47.01
US: JP4.7 R41.2 | length 17.3
  Top Layer w0.5: R41.2@64.538,22.343 67.093,22.343 68.428,23.678 69.2,24.45 69.2,26.516 70.142,27.458 70.142,28.508 71.842,30.209 71.842,31.209 72.167,31.534 72.403,31.77 JP4.7@75.45,31.77 ; 72.142,31.559 72.147,31.554 72.147,31.514
US1: 
US1: 
US1: 
US1: 
US1: 
US1: 
US1: 
US1: 
US1: 
UU1: C4.1 R24.1 R25.1 U6.15 | length 31.9
  Top Layer w0.5: U6.15@43.13,20.168 43.1,20.2 43.13,20.2 44.741,20.2 v1(44.985,19.956) ; v1(44.6,11.25) 44.65,11.2 57.192,11.2 57.939,10.454 57.939,9.557 57.939,9.543 57.962,9.543 59.839,9.543 v1@60.288,9.543 ; v1@59.539,9.503 59.839,9.503 61.195,9.503 R25.1@61.738,10.046
  Bottom Layer w0.4: C4.1@57.947,9.55 C4.1@58.55,9.55 ; C4.1@58.439,9.503 v1@59.536,9.503
  Bottom Layer w0.5: v1(44.6,11.25) 44.6,19.571 v1(44.985,19.956)
  other v1: 59.839,9.553
UU2: C5.1 R26.1 R27.1 U6.14 | length 33.6
  Top Layer w0.5: v1(43.1,14.55) 43.15,14.5 57.543,14.5 58.039,14.005 58.039,12.857 58.039,12.854 58.049,12.843 59.839,12.843 R27.1@61.738,12.843 ; 44.2,21.4 43.168,21.4 U6.14@43.13,21.438 44.817,21.438 v1(44.885,21.506)
  Bottom Layer w0.4: C5.1@57.947,12.852 58.448,12.852 C5.1@58.45,12.85
  Bottom Layer w0.5: v1(43.1,14.55) 43.1,20.9 43.6,21.4 44.779,21.4 v1(44.885,21.506) ; C5.1@58.039,12.852 58.448,12.852 59.837,12.852 v1(59.839,12.85)
UU3: C6.1 R28.1 R29.1 U6.13 | length 30
  Top Layer w0.4: U6.13@43.13,22.708 44.236,22.708 v1(45.285,23.757)
  Top Layer w0.5: v1(45.9,16.1) 51.5,16.1 53.05,17.65 57.294,17.65 58.425,16.519 58.901,16.043 v1(59.839,16.043) R29.1@61.738,16.043
  Bottom Layer w0.4: v1(45.285,23.757) 45.285,22.707 45.986,22.007 45.986,16.186 v1(45.9,16.1) ; C6.1@57.947,16.05 58.4,16.05 C6.1@58.405,16.055 ; C6.1@58.139,16.055 C6.1@58.405,16.055 ; C6.1@58.45,16.1 C6.1@58.405,16.055 ; v1@59.836,16.055 C6.1@58.405,16.055
  Bottom Layer w0.5: v1@45.85,16.15 v1(45.9,16.1)
UU4: C7.1 R32.1 R33.1 U6.1 | length 17.4
  Top Layer w0.5: U6.1@48.98,18.898 48.98,18.9 50.8,18.9 52.7,20.8 57.145,20.8 R32.1@57.989,19.956 ; R32.1@58.139,19.256 59.833,19.256 v1(59.839,19.25) ; R32.1@58.194,19.488 R32.1@58.282,19.4 ; v1@59.839,19.243 R33.1@61.738,19.243
  Bottom Layer w0.4: C7.1@57.947,19.25 C7.1@58.45,19.25 ; C7.1@57.962,19.257 59.832,19.257 v1(59.839,19.25) ; C7.1@58.389,19.256 v1@59.486,19.256
UU5: C9.1 D6.2 R47.2 R48.2 U6.2 | length 33
  Top Layer w0.5: v1(47.836,17.555) 47.386,18.006 47.386,19.736 47.8,20.15 47.818,20.168 U6.2@48.98,20.168 ; v1(48,30.35) 48.05,30.3 53.181,30.3 R48.2@54.838,28.643 54.851,28.657 v1(56.688,28.657) R47.2@58.545,28.659
  Bottom Layer w0.5: v1@47.8,17.555 47.8,30.15 v1(48,30.35) ; C9.1@54.85,28.65 54.857,28.657 v1(56.688,28.657) D6.2@58.545,28.659 57.545,28.659
UU6: C10.1 D7.2 R54.2 R55.2 U6.4 | length 29.6
  Top Layer w0.4: v4@46.786,22.957 46.786,22.907 46.985,22.708 U6.4@48.98,22.708
  Top Layer w0.5: v1(47.95,33.55) 48,33.6 53.181,33.6 R55.2@54.838,31.943 54.851,31.957 56.688,31.957 R54.2@58.545,31.959
  Bottom Layer w0.5: v4@46.8,22.957 46.8,24.907 47.036,25.143 47.036,27.708 46.8,27.944 46.8,32.4 v1(47.95,33.55) ; C10.1@54.838,31.943 54.848,31.944 54.85,31.944 54.95,31.95 v1(56.688,31.95) D7.2@58.545,31.959 57.545,31.959
  other v4: 46.736,22.957
UU7: C13.1 D8.2 R58.2 R59.2 U6.5 | length 34.1
  Top Layer w0.4: v1(45.685,25.257) 46.286,25.257 47.565,23.978 U6.5@48.98,23.978
  Top Layer w0.5: v1(46.05,36.95) 46.1,36.9 53.194,36.9 R59.2@54.844,35.25 ; 57.562,35.257 58.55,35.25 v1(56.688,35.25) R59.2@54.844,35.25 ; R59.2@54.844,35.25 R59.2@54.838,35.243 R59.2@54.844,35.25
  Bottom Layer w0.5: v1(45.685,25.257) 46.136,25.708 46.136,27.172 45.55,27.758 45.55,36.45 v1(46.05,36.95) ; C13.1@54.855,35.252 54.857,35.25 v1(56.688,35.25) D8.2@58.55,35.25
UU8: C24.1 D9.2 R68.2 R70.2 U6.12 | length 40.2
  Top Layer w0.5: v1(41.334,23.957) 43.102,23.957 U6.12@43.122,23.978 ; v1(42.2,40.15) 53.3,40.15 54.872,38.578 54.9,38.55 R70.2@54.855,38.552 ; U6.12@43.1,24 U6.12@43.122,23.978 ; U6.12@43.13,23.978 U6.12@43.122,23.978 ; R70.2@54.838,38.543 56.193,38.543 56.2,38.55 v1(56.688,38.55) 58.55,38.55 57.562,38.557
  Bottom Layer w0.5: v1(41.334,23.957) 41.95,24.573 41.95,39.9 v1(42.2,40.15) ; C24.1@54.855,38.552 54.857,38.55 v1(56.688,38.55) D9.2@58.539,38.561
UU9: C8.1 R35.1 R36.1 U10.1 | length 17.1
  Top Layer w0.25: U10.1@49.025,48.555 54.246,48.555 v1(55.538,47.263)
  Top Layer w0.5: R35.1@60.251,47.22 60.295,47.263 v1(61.589,47.263) 61.633,47.306 R36.1@62.878,47.306
  Bottom Layer w0.5: v1(55.538,47.263) 55.541,47.26 C8.1@62.893,47.26 ; v1@61.589,47.26 v1(61.589,47.263)
UU10: 
UU10: C40.1 D13.2 R51.2 R111.2 U10.2 | length 17.6
  Top Layer w0.3: U10.2@49.086,49.814 55.388,49.814 v1(55.538,49.964)
  Top Layer w0.5: D13.2@60.246,49.97 60.239,49.964 R51.2@62.79,49.964
  Bottom Layer w0.5: R111.2@54.188,49.964 C40.1@62.74,49.964
  other v1: 61.539,49.964
UU11: C38.1 D4.2 R49.2 R118.2 U10.4 | length 18
  Top Layer w0.3: U10.4@49.025,52.365 49.026,52.364 55.338,52.364 v1(55.538,52.564)
  Top Layer w0.5: D4.2@60.243,52.573 R49.2@62.881,52.573 ; v1(61.539,52.564) v1@61.539,52.573
  Bottom Layer w0.5: R118.2@54.138,52.521 54.181,52.564 C38.1@62.84,52.564
UU12: C39.1 D12.2 R45.2 R129.2 U10.5 | length 18.6
  Top Layer w0.3: U10.5@49.025,53.635 50.157,53.635 51.737,55.215 v1(55.538,55.215)
  Top Layer w0.5: D12.2@60.243,55.174 62.781,55.174 R45.2@62.84,55.115 ; v1@61.539,55.174 v1(61.539,55.215)
  Bottom Layer w0.5: R129.2@54.138,55.165 54.188,55.215 C39.1@62.84,55.215
UU13: C37.1 D3.2 R43.2 R128.2 U10.12 | length 29.9
  Top Layer w0.3: U10.12@43.175,53.635 44.965,53.635 v1(45.035,53.565) ; v1(45.085,59.016) 47.463,59.016 48.662,60.215 50.488,60.215 52.981,57.722 v1(55.538,57.722)
  Top Layer w0.5: D3.2@60.296,57.722 R43.2@62.803,57.722
  Bottom Layer w0.3: v1(45.035,53.565) 45.085,53.615 v1(45.085,59.016)
  Bottom Layer w0.5: R128.2@54.138,57.707 54.153,57.722 C37.1@62.183,57.722
  other v1: 61.489,57.722
UU14: C26.1 D10.2 R75.2 R76.2 U10.15 | length 27.7
  Top Layer w0.25: U10.15@43.175,49.825 44.874,49.825 v1(44.9,49.799)
  Top Layer w0.5: v1(44.9,42.3) 45.15,42.55 47.062,42.55 47.912,43.4 53.5,43.4 54.95,41.95 55.041,41.859 56.2,41.859 56.209,41.85 56.688,41.85 R75.2@58.545,41.859
  Bottom Layer w0.4: v1(44.9,42.3) v1(44.9,49.799)
  Bottom Layer w0.5: C26.1@54.85,41.85 54.859,41.859 v1(56.688,41.859) D10.2@58.545,41.859
VBAT: JP1.6 U13.19 | length 96.4
  Top Layer w0.25: U13.19@21.351,77.091 25.323,73.119 26.681,73.119 27.25,72.55 27.25,70.7 28.151,69.799 29.733,68.217 v1(31.108,68.217) ; v1(33.45,0.6) 36.985,0.6 37.083,0.501 43.415,0.501 JP1.6@44.656,-0.74
  Bottom Layer w0.3: v1(31.108,68.217) 31.032,68.141 31.032,62.214 33.181,60.065 33.181,57.464 34,56.645 34,47.409 33.853,47.262 33.853,46.014 34,45.866 34,29 33.6,28.6 33.6,27.75 34.7,26.65 34.7,3.8 33.45,2.55 v1(33.45,0.6)
VREF: C20.2 C25.2 R66.2 R126.2 U5.5 U13.10 U13.12 U24.9 | length 77.6
  Top Layer w0.25: U13.10@18.169,73.909 22.483,69.596 22.669,69.596 24.896,67.368 26.182,67.368 28.9,64.65 28.9,63.2 29.2,62.9 30.65,62.9 31.6,61.95 35.55,61.95 36.75,63.15 38.45,63.15 v1(39.25,63.95) ; U13.12@18.877,74.616 19.7,73.793 19.7,73.6 19.1,73
  Top Layer w0.4: R66.2@40.9,78.45 40.912,78.462 R66.2@40.943,78.462 R66.2@40.95,78.462 ; U24.9@43.595,93.975 43.595,92.455 43.6,92.45 ; R126.2@43.8,78.45 44.65,78.45 45.15,78.95 45.15,82.35 44.85,82.65 44.85,87.173 v1@44.85,87.25
  Top Layer w0.5: v1(39.75,74.3) 41.603,76.153 C25.2@42.147,76.153 ; R66.2@40.95,78.4 40.978,78.428 41.012,78.462 42.2,78.462 ; C25.2@42.25,76.1 42.25,76.153 42.25,78.412 42.2,78.462 ; U5.5@42.425,102.45 42.542,102.333 43.55,101.325 43.55,93.975 43.55,93.95 43.57,93.95 U24.9@43.595,93.975 ; R126.2@43.743,78.462 42.2,78.462
  Bottom Layer w0.3: 43.5,92.55 43.6,92.45
  Bottom Layer w0.4: v1(39.25,63.95) 39.25,66.2 38.95,66.5 38.95,68.55 39.75,69.35 v1(39.75,74.3) ; C20.2@41.838,90.506 43.267,90.506 43.56,90.799 ; v1@43.535,91.924 43.535,91.9 43.535,90.824 43.56,90.799 ; 43.585,90.824 43.56,90.799 ; v1@43.6,91.9 43.6,92.45 ; v1@44.85,87.25 44.985,87.385 44.985,89.374 43.56,90.799
  other v1: 44.785,87.173 43.5,91.9
VS: JP4.8 R71.2 | length 19
  Top Layer w0.5: R71.2@64.538,25.443 67.043,25.443 69.345,27.745 69.345,29.312 70.642,30.609 70.642,32.259 71.433,33.05 76.71,33.05 JP4.8@77.99,31.77
VS: 
pads on no net: JP4.30 JP6.10 U1.7 U1.11 U2.1 U2.5 U2.8 U3.1 U3.5 U3.6 U3.8 U3.9 U3.10 U3.11 U3.12 U3.25 U3.33 U3.38 U3.42 U3.45 U3.46 U4.3 U4.4 U4.5 U4.6 U4.7 U4.11 U4.12 U4.13 U4.15 U5.4 U9.1 U9.5 U9.8 U10.13 U11.5 U12.1 U13.1 U13.2 U13.3 U13.4 U13.5 U13.6 U13.14 U13.51 U13.52 U13.56 U13.67 U13.68 U13.69 U13.70 U13.73 U13.82 U13.85 U13.100 U24.12
copper on no net:
  other v3: -6.9,2.1 83.9,2.15 -6.9,4.1 83.9,4.15 -6.95,98.55 83.95,98.55 -6.95,100.55 83.95,100.55

## Polygon pours and split planes (outlines as drawn)
GND on Top Layer (hatched 90Degree grid 0.1 track 0.3, remove dead copper): 6.348,50.837 11.779,45.405 15.027,45.405 20.558,50.937 20.558,54.184 15.377,59.365 11.429,59.365 6.348,54.284
+3V3 on Top Layer (hatched 90Degree grid 0.1 track 0.3, remove dead copper): 6.828,53.885 6.828,51.035 11.978,45.885 14.828,45.885 20.078,51.135 20.078,53.985 15.178,58.885 11.628,58.885 6.828,54.085
NetU700_4 on Top Layer (hatched 90Degree grid 0.1 track 0.3, remove dead copper): 116.35,63 116.35,49.2 120.1,45.45 120.1,7.65 127.65,0.1 127.65,-3.5 135.5,-3.5 135.5,-0.85 141.55,5.2 141.55,24.65 147,30.1 151.6,34.7 151.6,63.4 116.3,63.4 116.3,62.85
GND on Top Layer (hatched 90Degree grid 0.1 track 0.3, remove dead copper): -7.802,109.328 -7.802,-5.701 84.071,-5.701 84.071,109.428 -7.802,109.428
+3V3 on Bottom Layer (hatched 90Degree grid 0.1 track 0.3, remove dead copper): 12,68.85 15.5,68.85 25.5,78.85 25.5,82 15.45,92.05 12.15,92.05 2.2,82.1 2.2,78.5 11.8,68.9
GND on Bottom Layer (hatched 90Degree grid 0.1 track 0.3, remove dead copper): -7.102,109.278 -7.102,-6.152 84.021,-6.152 84.021,108.977 -7.102,108.977

## Keep-outs
Keep-Out Layer:
  circle w0.25: c-84.15,116.6 r0
  circle w0.25: c-84.15,116.6 r0
  circle w0.25: c-84.15,116.6 r0
  circle w0.25: c-84.15,116.6 r0
  circle w0.25: c-84.15,116.6 r0
  circle w0.25: c-84.15,116.6 r0
  circle w0.25: c-84.15,116.6 r0
  circle w0.25: c-84.15,116.6 r0
  lines w0.25: -7.909,96.548 cw(c-6.95,96.5) -5.991,96.553 ; -7.909,102.597 ccw(c-6.95,102.65) -5.991,102.602 ; -7.86,0.098 cw(c-6.9,0.05) -5.941,0.103 ; -7.859,6.147 ccw(c-6.9,6.2) -5.941,6.152 ; -6,0 -6,107.75 83,107.75 ; -6,0.3 -6,-4.7 83,-4.7 83,0.3 ; -6,5.9 -6,96.6 ; 82.991,0.148 cw(c83.95,0.1) 84.909,0.153 ; 82.991,6.197 ccw(c83.95,6.25) 84.909,6.202 ; 82.991,96.548 cw(c83.95,96.5) 84.909,96.553 ; 82.991,102.597 ccw(c83.95,102.65) 84.91,102.602 ; 83,0 83,107.65 ; 83,6 83,96.8

## Silkscreen, mask and mechanical layers (free items; w line width, h text height)
Mechanical 1:
  lines w0.25: 49.7,-1.84 51.54,0 68,0

## Text inside footprints (layer, text, board x,y; h text height)
JP1: Top Overlay "10" at 38.052,-0.232 h1 r180; Top Overlay "9" at 38.052,2.308 h1 r180; Top Overlay "1" at 51.768,2.308 h1 r180; Top Overlay "2" at 52.276,-0.232 h1 r180
JP6: Top Overlay "20" at 38.734,103.632 h1; Top Overlay "19" at 38.734,101.092 h1; Top Overlay "1" at 11.81,101.092 h1; Top Overlay "2" at 11.81,103.632 h1